# EAGLE board 110719035 110719031 24組week7 (EAGLE 7.6.0)

Size 73.58 x 63.39 mm. Coordinates in mm from the lower left corner, seen from the top.
Outline: 0,0 56.82,0 56.82,53.33 0,53.33 0,0
Copper layers (1*16): Top 0.035mm / dielectric 1.5mm / Bottom 0.035mm
Design rules "default": minimum track width 10mil, minimum drill 24mil, track to track 8mil, track to pad 8mil, pad to pad 8mil, via to via 8mil, smd to smd 8mil, copper to edge 40mil, drill to drill 8mil, minimum pad ring 10mil, minimum via ring 8mil, stop-mask expansion 4mil, vias tented up to drill 0mil, thermal gap 10mil

## Footprints (pad centres in the part's own frame; a part is rotated, then mirrored left to right if it is on the bottom)
LED5MM = drill 0.813 octagon: A -1.27,0; K 1.27,0
0207/10 = drill 0.813 octagon: 1 -5.08,0; 2 5.08,0
DIP04YL = drill 0.813 long: 1 -3.81,-3.81; 2 -1.27,-3.81; 3 1.27,-3.81; 4 3.81,-3.81; 5 3.81,3.81; 6 1.27,3.81; 7 -1.27,3.81; 8 -3.81,3.81
ARDUINO_UNO = drill 1.016 pad 1.88: 0 63.5,50.8; 1 60.96,50.8; 2 58.42,50.8; 3 55.88,50.8; 3.3V 35.56,2.54; 4 53.34,50.8; 5 50.8,50.8; 5V 38.1,2.54; 6 48.26,50.8; 7 45.72,50.8; 8 41.656,50.8; 9 39.116,50.8; 10 36.576,50.8; 11 34.036,50.8; 12 31.496,50.8; 13 28.956,50.8; A0 50.8,2.54; A1 53.34,2.54; A2 55.88,2.54; A3 58.42,2.54; A4 60.96,2.54; A5 63.5,2.54; AREF 23.876,50.8; GND 26.416,50.8; GND. 43.18,2.54; GND.. 40.64,2.54; I/OREF 30.48,2.54; N/C 27.94,2.54; RESET 33.02,2.54; SCL 18.796,50.8; SDA 21.336,50.8; VIN 45.72,2.54 | hole 3.2: 66.04,7.62; 66.04,35.56; 15.24,50.8; 13.97,2.54
DIL14 = drill 0.813 long: 1 -7.62,-3.81; 2 -5.08,-3.81; 3 -2.54,-3.81; 4 0,-3.81; 5 2.54,-3.81; 6 5.08,-3.81; 7 7.62,-3.81; 8 7.62,3.81; 9 5.08,3.81; 10 2.54,3.81; 11 0,3.81; 12 -2.54,3.81; 13 -5.08,3.81; 14 -7.62,3.81

## Placement (x,y rotation side)
D2  [LED5MM]  5,137.08 0 top  (outside the outline)
D3  [LED5MM]  5,149.78 0 top  (outside the outline)
R1  220‎Ω  [0207/10]  5,35.48 0 top
R2  220‎Ω  [0207/10]  5,48.18 0 top
R7  220‎Ω  [0207/10]  5,111.68 0 top  (outside the outline)
R8  220‎Ω  [0207/10]  5,124.38 0 top  (outside the outline)
R9  220‎Ω  [0207/10]  5,162.48 0 top  (outside the outline)
R12  220‎Ω  [0207/10]  5,175.18 0 top  (outside the outline)
SW1  [DIP04YL]  5,22.78 0 top
SW2  [DIP04YL]  5,73.58 0 top  (outside the outline)
U1  [ARDUINO_UNO]  5,10.08 0 top
U3  [DIL14]  5,60.88 0 top
U4  [DIL14]  5,86.28 0 top  (outside the outline)
U5  [DIL14]  5,98.98 0 top  (outside the outline)

## Library data of the parts
D2 D3 R1 R2 R7-R9 R12 SW1 SW2 U1 U3-U5 = AUTODESK_CIRCUITS_BREADBOARD

## Nets
N$1: R1.1 SW1.8 U3.1
N$2: SW1.5
N$3: U3.3 U3.4
N$4: U3.13
N$5: U3.9
N$6: U3.12
N$7: U3.8
N$8: U3.10
N$9: U3.11
N$10: R8.1 SW2.8
N$11: R7.1 SW2.5
N$12: SW2.6
N$13: SW2.7
N$14: U4.6
N$15: U4.1
N$16: U4.4
N$17: U4.10 U4.11
N$18: U4.2
N$19: U4.5
N$20: U4.3
N$21: U5.1
N$22: U5.6
N$23: R12.1 U4.9 U5.9
N$24: U5.5
N$25: U5.8
N$26: R1.2 R2.2 R7.2 R8.2 U1.5V U3.14 U4.12 U4.13 U4.14 U5.10 U5.13 U5.14
N$27: U5.4
N$28: U3.2 U3.6 U5.11
N$29: U5.3
N$30: U5.2
N$31: SW1.6
N$32: D3.A R9.2
N$33: D2.A R12.2
N$34: R2.1 SW1.7 U3.5
N$35: R9.1 U4.8 U5.12
N$36: D2.K D3.K SW1.1 SW1.2 SW1.3 SW1.4 SW2.1 SW2.2 SW2.3 SW2.4 U1.GND.. U3.7 U4.7 U5.7

## Tracks (layer width: path | path; a pad name or v marks a point on that pad's centre or on a via)
N$1  (2 unrouted)
N$3  (1 unrouted)
N$10  (1 unrouted)
N$11  (1 unrouted)
N$17  (1 unrouted)
N$23  (2 unrouted)
N$26  (11 unrouted)
N$28  (2 unrouted)
N$32  (1 unrouted)
N$33  (1 unrouted)
N$34  (2 unrouted)
N$35  (2 unrouted)
N$36  (13 unrouted)